# Altium PCB llrf_afe.PcbDoc
Units mm, origin at the board's own origin, x right, y up, seen from the top; angles counter-clockwise.
Board outline 241.3 x 111.15 mm, 6 copper layers (TopLayer, InternalPlane1, MidLayer1, MidLayer2, InternalPlane2, BottomLayer); 1 components, 21 nets, 40 pads, 0 vias.
Unrouted connection lines stored in the file: 14.
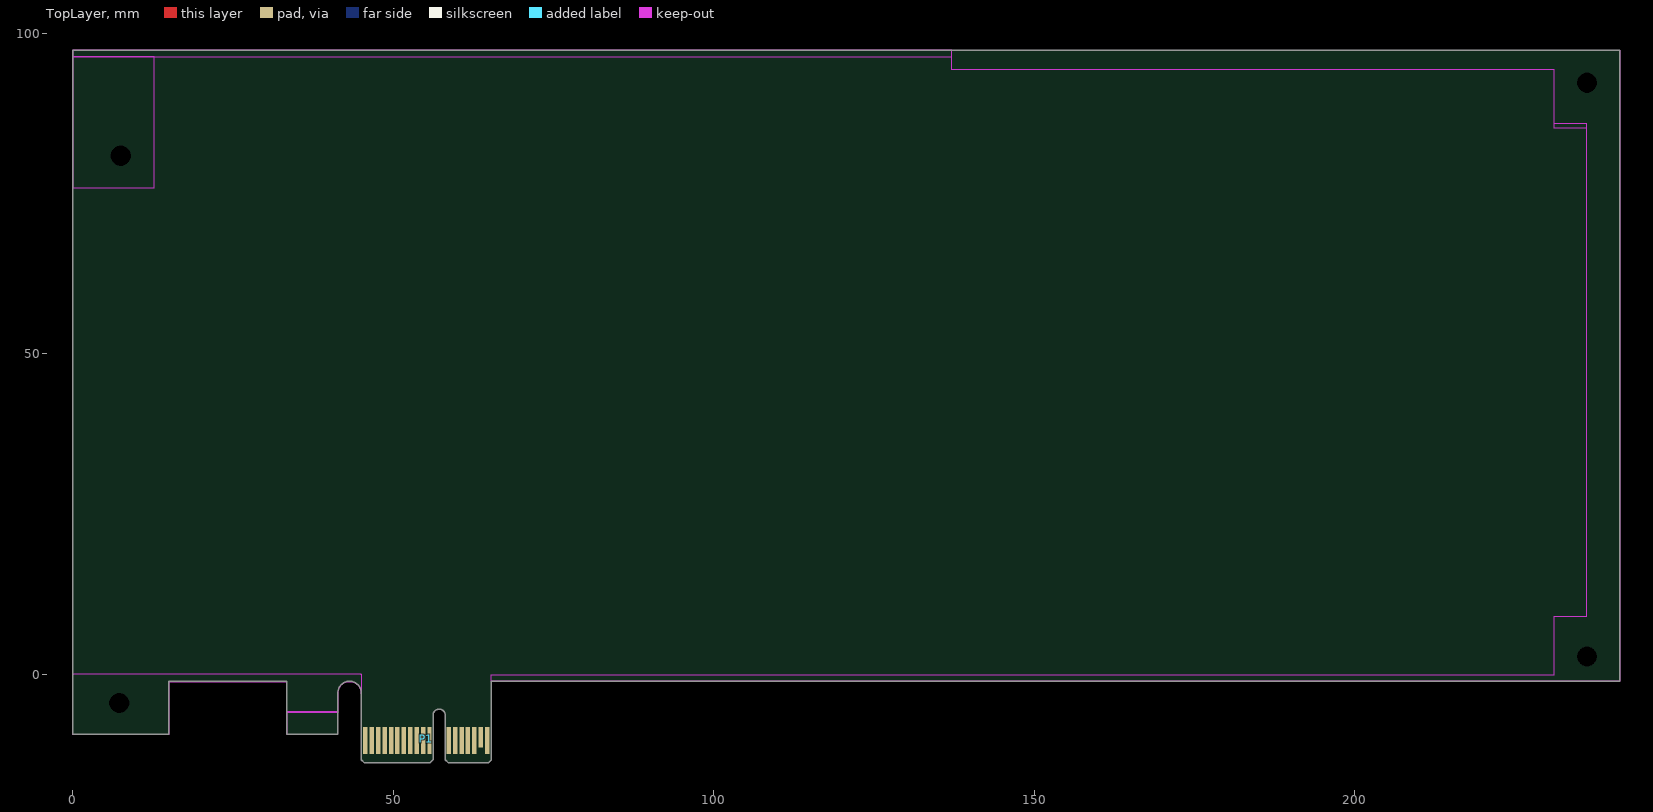
[diagram p0: TopLayer view]
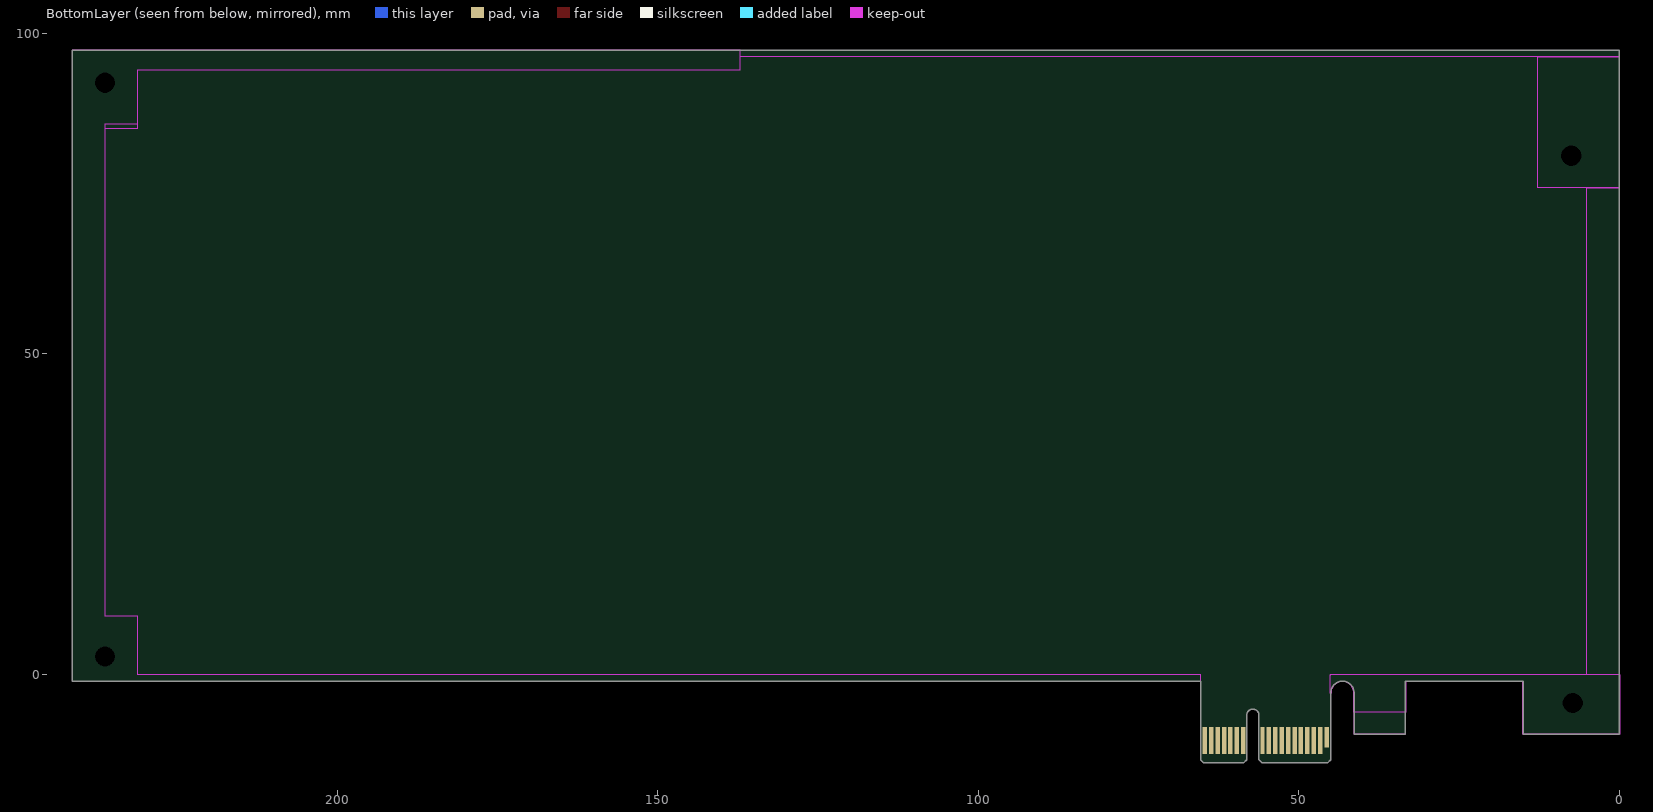
[diagram p1: BottomLayer view, seen from below]
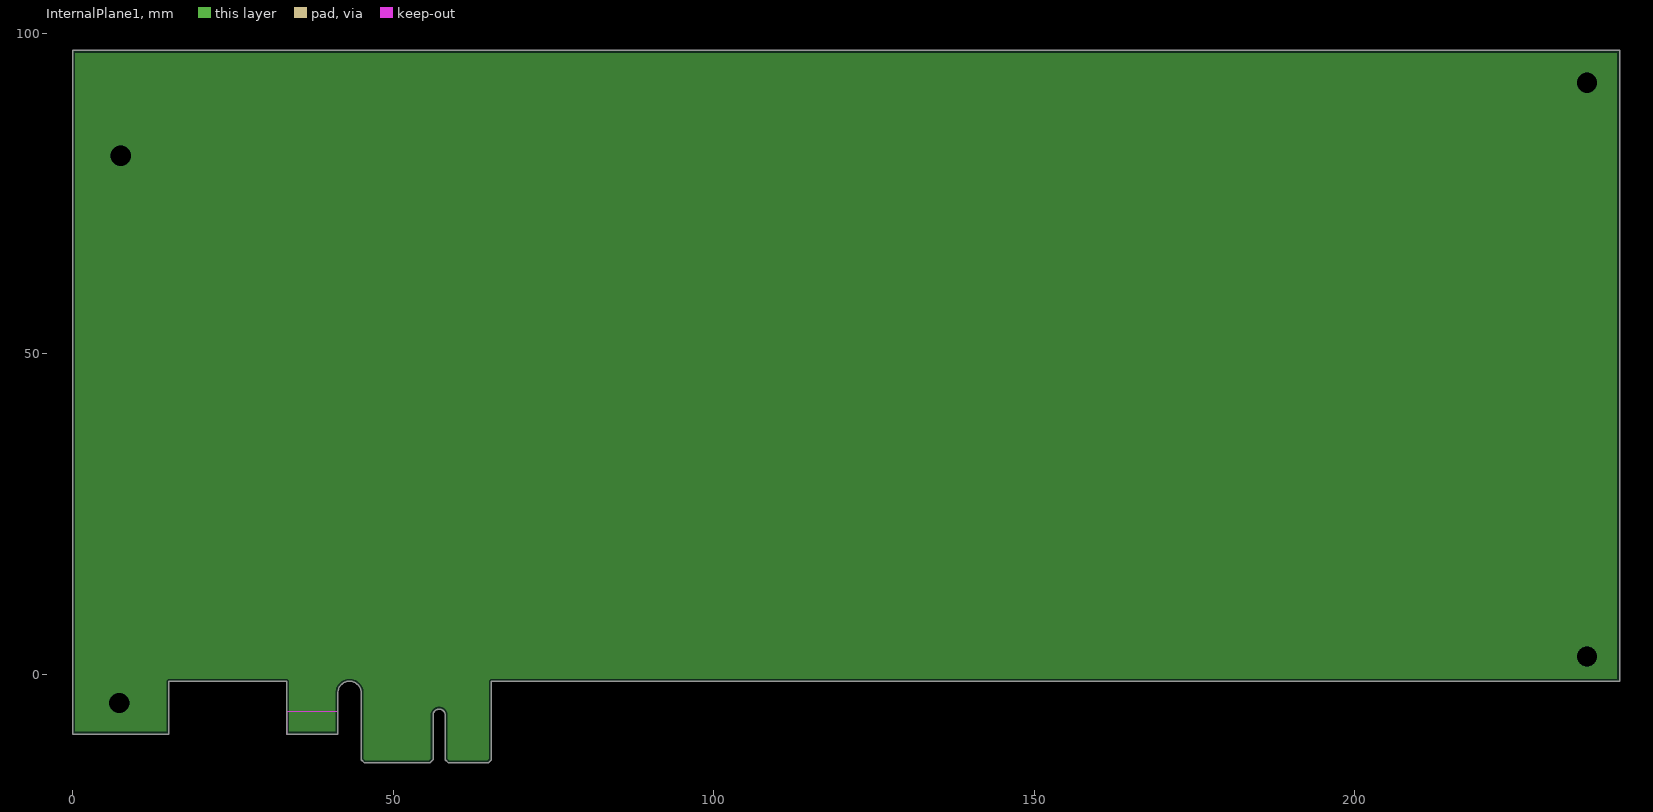
[diagram p2: InternalPlane1, clearances drawn from the general rule]
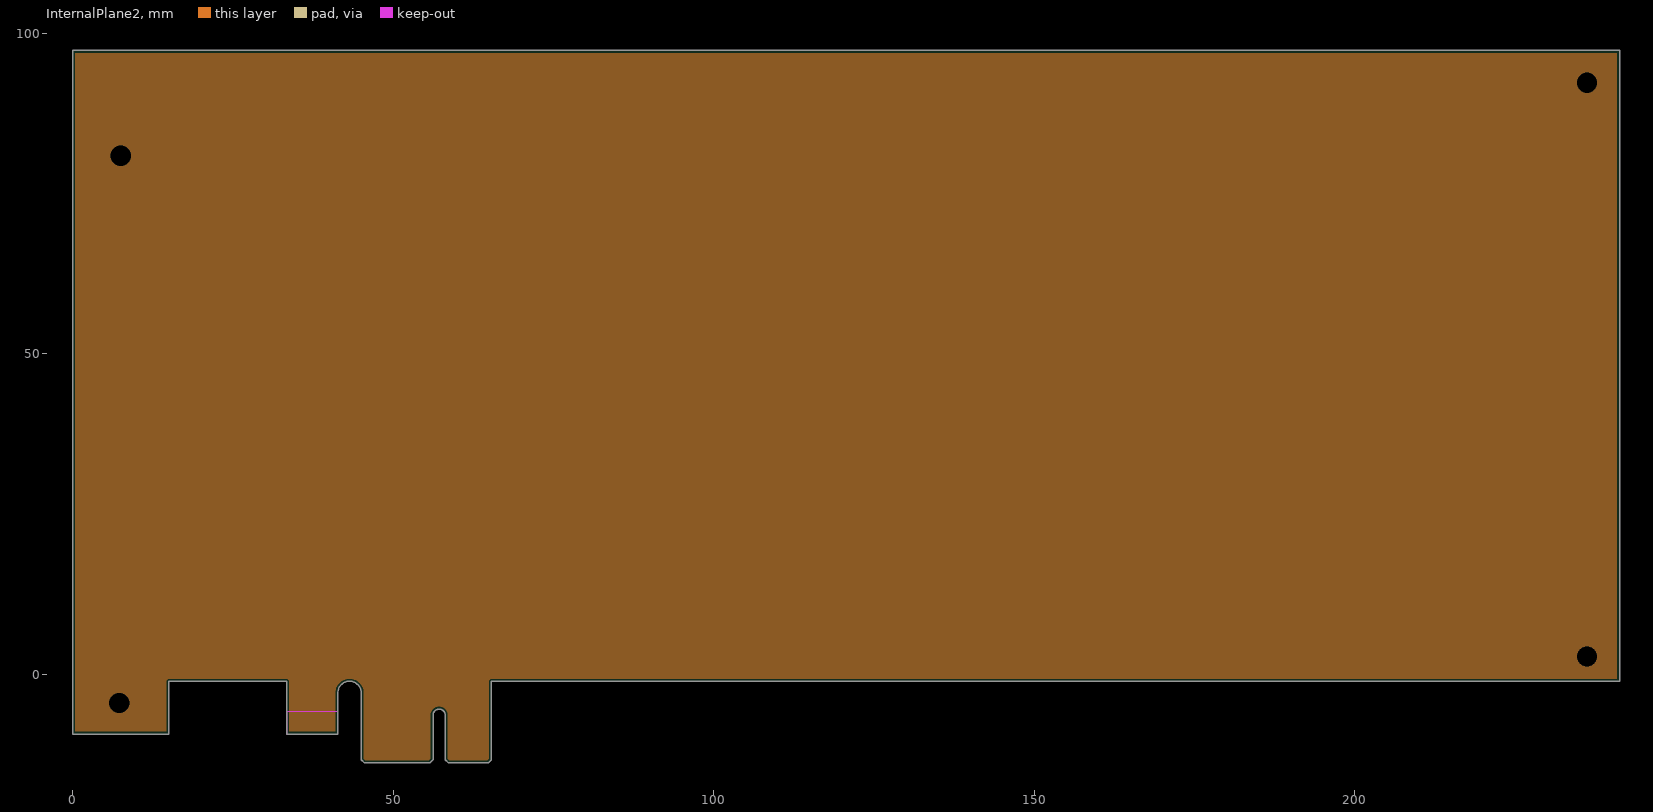
[diagram p3: InternalPlane2, clearances drawn from the general rule]

## Layer stack, top to bottom
TopSolder: solder mask 0.0102, Solder Resist, Dk 3.5
TopLayer: signal copper 0.0178
Dielectric1: core 0.32, FR-4, Dk 4.8
InternalPlane1: plane copper 0.0356
Dielectric4: prepreg 0.32, FR-4, Dk 4.8
MidLayer1: signal copper 0.0356
Dielectric2: core 0.32, FR-4, Dk 4.8
MidLayer2: signal copper 0.0356
Dielectric3: prepreg 0.32, FR-4, Dk 4.8
InternalPlane2: plane copper 0.0356
Dielectric5: core 0.32, FR-4, Dk 4.8
BottomLayer: signal copper 0.0178
BottomSolder: solder mask 0.0102, Solder Resist, Dk 3.5

## Board outline
0,-9.3 15,-9.3 15,-1.05 33.35,-1.05 33.35,-9.3 41.35,-9.3 41.35,-2.875 cw(c43.175,-2.875) 45,-2.875 45,-13.3 45.5,-13.8 55.7,-13.8 56.2,-13.3 56.2,-6.35 cw(c57.15,-6.35) 58.1,-6.35 58.1,-13.3 58.6,-13.8 64.8,-13.8 65.3,-13.3 65.3,-1.05 241.3,-1.05 241.3,97.35 0,97.35

## Design rules (kind name [scope] priority, off if disabled: settings)
Clearance [All] p1: gap=0.254 ignorepadtopadclearanceinfootprint=FALSE except(0: Arc-Hole Track-Hole SMDPad-Hole THPad-Hole Via-Hole Fill-Hole Poly-Hole Region-Hole Text-Hole)
DiffPairsRouting [All] p1: maxlimit=0.254 minlimit=0.254 mostfreqgap=0.254 toplayer_minwidth=0.381 toplayer_maxwidth=0.381 toplayer_prefwidth=0.381 midlayer1_minwidth=0.381 midlayer1_maxwidth=0.381 midlayer1_prefwidth=0.381 midlayer2_minwidth=0.381 midlayer2_maxwidth=0.381 midlayer2_prefwidth=0.381 bottomlayer_minwidth=0.381 bottomlayer_maxwidth=0.381 bottomlayer_prefwidth=0.381 maxuncoupledlength=12.7
FabricationTestPointUsage TestPointUsage [All] p1: valid=0 allowmultiple=FALSE
FabricationTestpoint Testpoint [All] p1: side=3 testpointundercomponent=TRUE minsize=1.016 maxsize=2.54 preferedsize=1.524 minholesize=0.508 maxholesize=1.016 preferedholesize=0.813 testpointgrid=0.025 allowsidetop=TRUE allowsidebottom=TRUE usegrid=TRUE gridtolerance=0
Height "PCI Express, Page 84, \"Component Height Constraints\" for solder side" [OnBottomLayer] p1: minheight=0 maxheight=2.67 prefheight=2.67
Height "PCI Express, Page 84, \"Component Height Constraints\" for component side" [OnTopLayer] p2: minheight=0 maxheight=14.47 prefheight=14.47
PlaneClearance [All] p1: clearance=0
PlaneConnect [All] p1: planeconnectstyle=Relief reliefexpansion=0.508 reliefentries=4 reliefconductorwidth=0.254 reliefairgap=0.254
PolygonConnect [All] p1: connectstyle=Relief reliefconductorwidth=0.254 reliefentries=4 polygonreliefangle="90 Angle" airgapwidth=0.254
RoomDefinition "Component Free Area" [InAnyComponent] p1: confinementstyle=ConfineOut formatcopy=TRUE lockcomponents=FALSE outline 142.05,-0.05 142.05,0.3 150.2,0.3 150.2,2.3 155.45,2.3 155.45,-0.05
RoutingVias [All] p1: holewidth=0.711 width=1.27 viastyle="Through Hole" minholewidth=0.711 minwidth=1.27 maxholewidth=0.711 maxwidth=1.27
SilkToSolderMaskClearance SilkscreenOverComponentPads [IsPad] p1: minsilkscreentomaskgap=0.254 clearancetoexposedcopper=TRUE
SolderMaskExpansion [All] p1: expansion=0 istentingtop=FALSE
Width [All] p1: maxlimit=0.254 minlimit=0.254 preferedwidth=0.254
23 further rules are at their usual default settings.

## Classes and differential pairs
net class JTAG[1..5]: JTAG1 JTAG2 JTAG3 JTAG4 JTAG5
differential pair PET0: +PET0_P -PET0_N
differential pair PER0: +PER0_P -PER0_N

## Components (designator, comment, footprint, x,y, rotation, side; value= is the part's Value field where it differs from the comment)
P1 "PCIeX1-GF-2D-1000-1K-O36" PCIeX1-GF-2D-1000-1K-O36 55.15,-10.3 r0 top locked

## Footprints (in the part's own frame and the unit in brackets; to place one, negate y for a bottom-side part, rotate by r counter-clockwise, add the part's x,y. Pads: shape width x height; smd on the part's side, far side on the other; paste and mask are expansions set on the pad)
PCIeX1-GF-2D-1000-1K-O36 [mm] "Golden finger, PCIeX1, Dual, Opposite, Pitch 1mm, 36-Position"
  rect 0.7x3.2 smd far side: A1(-9.5,0.5)
  rect 0.7x4.2 smd far side: A2(-8.5,0) A3(-7.5,0) A4(-6.5,0) A5(-5.5,0) A6(-4.5,0) A7(-3.5,0) A8(-2.5,0) A9(-1.5,0) A10(-0.5,0) A11(0.5,0) A12(3.5,0) A13(4.5,0) A14(5.5,0) A15(6.5,0) A16(7.5,0) A17(8.5,0) A18(9.5,0)
  rect 0.7x4.2 smd: B1(-9.5,0) B2(-8.5,0) B3(-7.5,0) B4(-6.5,0) B5(-5.5,0) B6(-4.5,0) B7(-3.5,0) B8(-2.5,0) B9(-1.5,0) B10(-0.5,0) B11(0.5,0) B12(3.5,0) B13(4.5,0) B14(5.5,0) B15(6.5,0) B16(7.5,0) B18(9.5,0)
  rect 0.7x3.2 smd: B17(8.5,0.5)

## Part data
P1: library part CMP-0001-00030-1, "Golden finger, PCIeX1, Dual, Opposite, Pitch 1mm, 36-Position"

## Free pads (board coordinates)
  round 2.88 hole 3.18 unplated: MH1(7.25,-4.45) MH2(236.22,2.8) MH3(7.5,80.95) MH4(236.22,92.33)

## Nets (pads, with @x,y where several pads share a name; then routed paths per layer and width w, separated by ;. In a path a pad name is that pad's centre, name@x,y a point inside that pad or via, vN(x,y) a via of type N, cw(c..) or ccw(c..) an arc to the next point about the centre after c; other vN are vias at no path point)
3.3VAUX: P1.B10
+3.3V: P1.A9 P1.A10 P1.B8
+12V: P1.A2 P1.A3 P1.B1 P1.B2 P1.B3
GND: P1.A4 P1.A12 P1.A15 P1.A18 P1.B4 P1.B7 P1.B13 P1.B16 P1.B18
JTAG1: P1.B9
JTAG2: P1.A5
JTAG3: P1.A6
JTAG4: P1.A7
JTAG5: P1.A8
PER0_N: P1.A17
PER0_P: P1.A16
PERST#: P1.A11
PET0_N: P1.B15
PET0_P: P1.B14
PRSNT1#: P1.A1
PRSNT2#: P1.B17
REFCLK+: P1.A13
REFCLK-: P1.A14
SMCLK: P1.B5
SMDAT: P1.B6
WAKE#: P1.B11
pads on no net: P1.B12

## Polygon pours and split planes (outlines as drawn)
no net on InternalPlane1 (split plane): 240.917,-0.668 65.3,-0.668 65.225,-0.675 65.153,-0.697 65.087,-0.732 65.029,-0.78 64.982,-0.838 64.946,-0.904 64.925,-0.976 64.917,-1.05 64.917,-13.142 64.641,-13.418 58.759,-13.418 58.483,-13.142 58.483,-6.35 58.475,-6.201 58.45,-6.054 58.408,-5.91 58.351,-5.772 58.279,-5.641 58.192,-5.519 58.093,-5.408 57.981,-5.308 57.859,-5.222 57.728,-5.149 57.59,-5.092 57.447,-5.051 57.299,-5.026 57.15,-5.017 57.001,-5.026 56.853,-5.051 56.71,-5.092 56.572,-5.149 56.441,-5.222 56.319,-5.308 56.207,-5.408 56.108,-5.519 56.021,-5.641 55.949,-5.772 55.892,-5.91 55.85,-6.054 55.825,-6.201 55.817,-6.35 55.817,-13.142 55.541,-13.418 45.659,-13.418 45.383,-13.142 45.383,-2.875 45.375,-2.683 45.35,-2.492 45.308,-2.304 45.25,-2.12 45.176,-1.942 45.087,-1.771 44.984,-1.609 44.867,-1.456 44.736,-1.314 44.594,-1.184 44.442,-1.067 44.279,-0.963 44.108,-0.874 43.93,-0.8 43.746,-0.743 43.558,-0.701 43.367,-0.676 43.175,-0.667 42.983,-0.676 42.792,-0.701 42.604,-0.743 42.42,-0.8 42.242,-0.874 42.071,-0.963 41.908,-1.067 41.756,-1.184 41.614,-1.314 41.483,-1.456 41.366,-1.609 41.263,-1.771 41.174,-1.942 41.1,-2.12 41.042,-2.304 41,-2.492 40.975,-2.683 40.967,-2.875 40.967,-8.918 33.733,-8.918 33.733,-1.05 33.725,-0.976 33.704,-0.904 33.668,-0.838 33.621,-0.78 33.563,-0.732 33.497,-0.697 33.425,-0.675 33.35,-0.668 15,-0.668 14.925,-0.675 14.853,-0.697 14.787,-0.732 14.729,-0.78 14.682,-0.838 14.646,-0.904 14.625,-0.976 14.617,-1.05 14.617,-8.918 0.383,-8.918 0.383,96.967 240.917,96.967
no net on InternalPlane2 (split plane): 240.917,-0.668 65.3,-0.668 65.225,-0.675 65.153,-0.697 65.087,-0.732 65.029,-0.78 64.982,-0.838 64.946,-0.904 64.925,-0.976 64.917,-1.05 64.917,-13.142 64.641,-13.418 58.759,-13.418 58.483,-13.142 58.483,-6.35 58.475,-6.201 58.45,-6.054 58.408,-5.91 58.351,-5.772 58.279,-5.641 58.192,-5.519 58.093,-5.408 57.981,-5.308 57.859,-5.222 57.728,-5.149 57.59,-5.092 57.447,-5.051 57.299,-5.026 57.15,-5.017 57.001,-5.026 56.853,-5.051 56.71,-5.092 56.572,-5.149 56.441,-5.222 56.319,-5.308 56.207,-5.408 56.108,-5.519 56.021,-5.641 55.949,-5.772 55.892,-5.91 55.85,-6.054 55.825,-6.201 55.817,-6.35 55.817,-13.142 55.541,-13.418 45.659,-13.418 45.383,-13.142 45.383,-2.875 45.375,-2.683 45.35,-2.492 45.308,-2.304 45.25,-2.12 45.176,-1.942 45.087,-1.771 44.984,-1.609 44.867,-1.456 44.736,-1.314 44.594,-1.184 44.442,-1.067 44.279,-0.963 44.108,-0.874 43.93,-0.8 43.746,-0.743 43.558,-0.701 43.367,-0.676 43.175,-0.667 42.983,-0.676 42.792,-0.701 42.604,-0.743 42.42,-0.8 42.242,-0.874 42.071,-0.963 41.908,-1.067 41.756,-1.184 41.614,-1.314 41.483,-1.456 41.366,-1.609 41.263,-1.771 41.174,-1.942 41.1,-2.12 41.042,-2.304 41,-2.492 40.975,-2.683 40.967,-2.875 40.967,-8.918 33.733,-8.918 33.733,-1.05 33.725,-0.976 33.704,-0.904 33.668,-0.838 33.621,-0.78 33.563,-0.732 33.497,-0.697 33.425,-0.675 33.35,-0.668 15,-0.668 14.925,-0.675 14.853,-0.697 14.787,-0.732 14.729,-0.78 14.682,-0.838 14.646,-0.904 14.625,-0.976 14.617,-1.05 14.617,-8.918 0.383,-8.918 0.383,96.967 240.917,96.967

## Keep-outs
TopLayer:
  rectangle: 0,75.9 12.7,96.35
  rectangle: 0,96.35 137.15,97.35
  region: 0,-9.351 15,-9.351 ccw(c15,-9.3) 15.05,-9.3 15.05,-1.101 33.3,-1.101 33.3,-5.85 ccw(c33.35,-5.85) 33.35,-5.901 41.35,-5.901 ccw(c41.35,-5.85) 41.4,-5.85 ccw(c41.35,-5.85) 41.4,-5.85 41.4,-2.875 cw(c43.175,-2.875) 44.95,-2.875 ccw(c45,-2.875) 45.05,-2.875 45.05,-0.05 ccw(c45,-0.05) 45,0 0,0 ccw(c0,-0.05) -0.05,-0.05 -0.05,-9.3 ccw(c0,-9.3)
  region: 65.3,-1.05 65.3,-0.05 231.1,-0.05 231.1,9.1 236.22,9.1 236.22,85.2 231.1,85.2 231.1,94.35 137.15,94.35 137.15,97.35 241.3,97.35 241.3,-1.05
  region: 65.3,-1.05 65.3,-0.05 231.1,-0.05 231.1,9.1 236.22,9.1 236.22,85.9 231.1,85.9 231.1,94.35 137.15,94.35 137.15,97.35 241.3,97.35 241.3,-1.05
BottomLayer:
  rectangle: 0,96.35 137.15,97.35
  rectangle: 0,75.9 12.7,96.35
  rectangle: 0,-0.05 5.08,75.9
  region: 0,-9.351 15,-9.351 ccw(c15,-9.3) 15.05,-9.3 15.05,-1.101 33.3,-1.101 33.3,-5.85 ccw(c33.35,-5.85) 33.35,-5.901 41.35,-5.901 ccw(c41.35,-5.85) 41.4,-5.85 ccw(c41.35,-5.85) 41.4,-5.85 41.4,-2.875 cw(c43.175,-2.875) 44.95,-2.875 ccw(c45,-2.875) 45.05,-2.875 45.05,-0.05 ccw(c45,-0.05) 45,0 0,0 ccw(c0,-0.05) -0.05,-0.05 -0.05,-9.3 ccw(c0,-9.3)
  region: 65.3,-1.05 65.3,-0.05 231.1,-0.05 231.1,9.1 236.22,9.1 236.22,85.2 231.1,85.2 231.1,94.35 137.15,94.35 137.15,97.35 241.3,97.35 241.3,-1.05
  region: 65.3,-1.05 65.3,-0.05 231.1,-0.05 231.1,9.1 236.22,9.1 236.22,85.9 231.1,85.9 231.1,94.35 137.15,94.35 137.15,97.35 241.3,97.35 241.3,-1.05
TopSolder:
  rectangle: 33.35,-9.3 41.35,-5.85
BottomSolder:
  rectangle: 33.35,-9.3 41.35,-5.85
KeepOutLayer:
  rectangle: 33.35,-9.3 41.35,-5.85

## Silkscreen, mask and mechanical layers (free items; w line width, h text height)
PCI-SIG Outline:
  the board outline again, w0.1
PCI-SIG Notes:
  text "- Nominal values used, dimensions in mm" at 252,47.284 h1.52
  text "- The mounting holes and keep-out areas around them are only required when the I/O bracket is mounted on the card directly" at 252,45.506 h1.52
  text "- Component height rule and clearance rule derived from PCI_Express_CEM_r2.0.pdf, Page 84." at 252,43.728 h1.52
  text "- Stackup is not specified in PCI_Express_CEM_r2.0.pdf, nor implemented in this template." at 252,41.95 h1.52
Mechanical7:
  lines w0.1: 0,-9.3 0,-0.05 45,-0.05 45,-2.875 ccw(c43.175,-2.875) 41.35,-2.875 41.35,-5.85 33.35,-5.85 33.35,-1.05 15,-1.05 15,-9.3 0,-9.3 ; 65.3,-1.05 241.3,-1.05 241.3,97.35 137.15,97.35 137.15,94.35 231.1,94.35 231.1,85.9 236.22,85.9 236.22,9.1 231.1,9.1 231.1,-0.05 65.3,-0.05 65.3,-1.05
DrillDrawing:
  text ".LEGEND" at 225.25,45.552 h1
  text "Drilling Details." at 225.25,43.723 h1

## Dimensions
0,-13.8 to 0,97.35 on PCI-SIG Dimensions
0,-9.3 to 0,97.35 on PCI-SIG Dimensions
0,97.35 to 241.3,97.35 on PCI-SIG Dimensions